# EAGLE board Board (EAGLE 9.6.2)

Size 95.25 x 186.69 mm. Coordinates in mm from the lower left corner, seen from the top.
Outline: 0,0 0,6.35
Outline: 0,6.35 0,184.15 3.81,186.69 92.71,186.69 95.25,185.42 95.25,6.35 92.71,3.81 2.54,3.81 0,6.35
Copper layers (1*16): Top 0.035mm / dielectric 1.5mm / Bottom 0.035mm
Design rules "default": minimum track width 6mil, minimum drill 0.35mm, track to track 6mil, track to pad 6mil, pad to pad 6mil, via to via 6mil, smd to smd 6mil, copper to edge 40mil, drill to drill 6mil, minimum pad ring 10mil, minimum via ring 8mil, stop-mask expansion 4mil, vias tented up to drill 0mil, thermal gap 10mil

## Footprints (pad centres in the part's own frame; a part is rotated, then mirrored left to right if it is on the bottom)
E3,5-8 = drill 0.813 pad 1.6: + -1.778,0 | drill 0.813 pad 1.6 octagon: - 1.778,0
DO41-10 = drill 1.118 long: A 5.08,0; C -5.08,0
DO41Z10 = drill 1.118: A 5.08,0; C -5.08,0
MA04-1 = drill 1.016 long: 1 -3.81,0; 2 -1.27,0; 3 1.27,0; 4 3.81,0
CUI_TB006-508-03BE = drill 1.3 square: 1 0,0 | drill 1.3: 2 5.08,0; 3 10.16,0
RELAY_SRD-05VDC-SL-C = drill 1.32 square: A1 -6.1,6 | drill 1.32: A2 -6.1,-6; NC 6.1,6; NO 6.1,-6 | drill 1.29: COM -8.1,0
DIL04 = drill 0.813 offset: 1 -1.27,-3.81; 2 1.27,-3.81; 3 1.27,3.81; 4 -1.27,3.81
TO92-EBC = drill 0.813 long: B 0,-1.27; C -2.54,-1.27; E 2.54,-1.27
0207/10 = drill 0.813 octagon: 1 -5.08,0; 2 5.08,0
MA03-2 = drill 1.016: 1 -2.54,-1.27 | drill 1.016 octagon: 2 -2.54,1.27; 3 0,-1.27; 4 0,1.27; 5 2.54,-1.27; 6 2.54,1.27
MODULE_DEVKIT_V1_ESP32-WROOM-32 = drill 1.02 square: 1 -12.7,22.85 | drill 1.02: 2 -12.7,20.31; 3 -12.7,17.77; 4 -12.7,15.23; 5 -12.7,12.69; 6 -12.7,10.15; 7 -12.7,7.61; 8 -12.7,5.07; 9 -12.7,2.53; 10 -12.7,-0.01; 11 -12.7,-2.55; 12 -12.7,-5.09; 13 -12.7,-7.63; 14 -12.7,-10.17; 15 -12.7,-12.71; 16 -12.7,-15.25; 17 -12.7,-17.79; 18 -12.7,-20.33; 19 -12.7,-22.87; 20 12.7,-22.87; 21 12.7,-20.33; 22 12.7,-17.79; 23 12.7,-15.25; 24 12.7,-12.71; 25 12.7,-10.17; 26 12.7,-7.63; 27 12.7,-5.09; 28 12.7,-2.55; 29 12.7,-0.01; 30 12.7,2.53; 31 12.7,5.07; 32 12.7,7.61; 33 12.7,10.15; 34 12.7,12.69; 35 12.7,15.23; 36 12.7,17.77; 37 12.7,20.31; 38 12.7,22.85
332-02 = drill 0.9 pad 1.27: 1 0,-1; 2 0,1
W237-102 = drill 1.194 long: 1 -2.5,-1.27; 2 2.5,-1.27
W237-4 = drill 1.194 long: 1 -7.5,-1.27; 2 -2.5,-1.27; 3 2.5,-1.27; 4 7.5,-1.27

## Placement (x,y rotation side)
C1  100n  [E3,5-8]  29.21,77.47 270 top
C2  100n  [E3,5-8]  29.21,92.71 270 top
C3  100n  [E3,5-8]  29.21,107.95 270 top
C4  100n  [E3,5-8]  29.21,121.92 270 top
CA1  100n  [E3,5-8]  73.66,69.85 270 top
CA2  100n  [E3,5-8]  73.66,49.53 90 top
D1  1N4004  [DO41-10]  63.5,83.82 0 top
D2  1N4004  [DO41-10]  53.09,13.59 270 top
D3  1N4004  [DO41-10]  59.69,13.97 270 top
D4  1N4004  [DO41-10]  63.5,78.74 0 top
D5  1N4004  [DO41-10]  67.31,153.67 270 top
D6  1N4004  [DO41-10]  71.12,105.41 180 top
D7  1N4004  [DO41-10]  63.5,88.9 0 top
D8  1N4004  [DO41-10]  63.5,93.98 0 top
D9  1N4004  [DO41-10]  54.61,153.67 270 top
D10  1N4004  [DO41-10]  71.12,116.84 180 top
D11  1N4004  [DO41-10]  41.91,153.67 270 top
D12  1N4004  [DO41-10]  55.88,106.68 180 top
D13  1N4004  [DO41-10]  27.94,153.67 270 top
D14  1N4004  [DO41-10]  55.88,118.11 180 top
DZA1  1N4728  [DO41Z10]  58.42,64.77 0 top
DZA2  1N4728  [DO41Z10]  58.42,71.12 180 top
DZA3  1N4728  [DO41Z10]  58.42,57.15 0 top
DZA4  1N4728  [DO41Z10]  58.42,50.8 180 top
I2C  [MA04-1]  3.81,92.71 90 top
J1  WAGO-03BE  [CUI_TB006-508-03BE]  8.89,8.89 0 top
J2  WAGO-03BE  [CUI_TB006-508-03BE]  66.04,10.16 0 top
J3  WAGO-03BE  [CUI_TB006-508-03BE]  36.83,8.89 0 top
K1  SRD-05VDC-SL-C  [RELAY_SRD-05VDC-SL-C]  71.12,26.67 270 top
K3  SRD-05VDC-SL-C  [RELAY_SRD-05VDC-SL-C]  41.91,26.67 270 top
OK1  PC817  [DIL04]  67.31,40.64 270 top
OK2  PC817  [DIL04]  38.1,40.64 270 top
OK3  PC817  [DIL04]  16.51,78.74 180 top
OK4  PC817  [DIL04]  72.39,100.33 270 top
OK5  PC817  [DIL04]  16.51,92.71 180 top
OK6  PC817  [DIL04]  16.51,106.68 180 top
OK7  PC817  [DIL04]  16.51,120.65 180 top
OK8  PC817  [DIL04]  72.39,111.76 270 top
OK9  PC817  [DIL04]  57.15,100.33 270 top
OK10  PC817  [DIL04]  57.15,113.03 270 top
Q1  BC338  [TO92-EBC]  45.72,40.64 90 top
Q2  BC338  [TO92-EBC]  74.93,40.64 90 top
R1  470  [0207/10]  30.48,85.09 180 top
R2  220  [0207/10]  59.69,40.64 90 top
R3  2K  [0207/10]  59.69,27.94 270 top
R4  220  [0207/10]  53.34,40.64 90 top
R5  2K  [0207/10]  53.34,27.94 270 top
R6  3K  [0207/10]  35.56,77.47 90 top
R7  220  [0207/10]  72.39,153.67 270 top
R8  220  [0207/10]  62.23,153.67 90 top
R9  470  [0207/10]  30.48,100.33 0 top
R10  3K  [0207/10]  35.56,92.71 90 top
R11  470  [0207/10]  30.48,115.57 180 top
R12  3K  [0207/10]  35.56,107.95 90 top
R13  470  [0207/10]  30.48,130.81 180 top
R14  3K  [0207/10]  35.56,123.19 90 top
R15  220  [0207/10]  58.42,153.67 270 top
R16  220  [0207/10]  50.8,153.67 90 top
R17  220  [0207/10]  46.99,153.67 270 top
R18  220  [0207/10]  36.83,153.67 90 top
R19  220  [0207/10]  31.75,153.67 270 top
R20  220  [0207/10]  21.59,153.67 90 top
R23  3K  [0207/10]  8.89,92.71 270 top
R24  3K  [0207/10]  8.89,78.74 270 top
R25  3K  [0207/10]  8.89,106.68 90 top
R26  3K  [0207/10]  8.89,120.65 90 top
RA11  10K  [0207/10]  48.26,67.31 90 top
RA12  100K  [0207/10]  38.1,62.23 0 top
RA13  1K  [0207/10]  38.1,67.31 0 top
RA21  10K  [0207/10]  48.26,52.07 90 top
RA22  100K  [0207/10]  38.1,46.99 0 top
RA23  1K  [0207/10]  38.1,50.8 0 top
SPI  [MA03-2]  3.81,73.66 90 top
U2  DEVKIT_V1_ESP32-WROOM-32  [MODULE_DEVKIT_V1_ESP32-WROOM-32]  15.24,40.64 0 top
UART  332-02  [332-02]  3.81,82.55 180 top
X7  [W237-102]  73.66,59.69 90 top
XINPUT  [W237-4]  73.66,86.36 90 top
XOUTPUT  [W237-4]  67.31,129.54 180 top

## Library data of the parts
C1-C4 CA1 CA2 = rcl; SPICEPREFIX: C
D1-D14 DZA1-DZA4 = diode
I2C SPI = con-lstb; OC_FARNELL: unknown; OC_NEWARK: unknown
J1-J3 = TB006-508-03BE; AVAILABILITY: In Stock; CHECK_PRICES: https://www.snapeda.com/parts/TB006-508-03BE/Same+Sky/view-part/?ref=eda; DESCRIPTION: 2~24 Poles, Screw Type, Horizontal, 5.08 Pitch, 26~14 (AWG), Terminal Block Connector; MF: Same Sky; MP: TB006-508-03BE; PACKAGE: None; PRICE: None; SNAPEDA_LINK: https://www.snapeda.com/parts/TB006-508-03BE/Same+Sky/view-part/?ref=snap
K1 K3 = SRD-05VDC-SL-C; AVAILABILITY: In Stock; CHECK_PRICES: https://www.snapeda.com/parts/SRD-05VDC-SL-C/Songle+Relay/view-part/?ref=eda; DESCRIPTION: 5V Trigger Relay Module For Arduino And Raspberry Pi 5V Trigger Relay Module For Arduino And Raspberry Pi; MF: Songle Relay; MP: SRD-05VDC-SL-C; PACKAGE: NON STANDARD-5 Songle Relay; PRICE: None; SNAPEDA_LINK: https://www.snapeda.com/parts/SRD-05VDC-SL-C/Songle+Relay/view-part/?ref=snap
OK1-OK10 = optocoupler; MPN: PC817X4J000F; OC_FARNELL: 9707727; OC_NEWARK: 97K7059
Q1 Q2 = transistor-npn
R1-R20 R23-R26 RA11-RA13 RA21-RA23 = rcl; SPICEPREFIX: R
U2 = DEVKIT_V1_ESP32-WROOM-32; AVAILABILITY: Not in stock; CHECK_PRICES: https://www.snapeda.com/parts/DEVKIT%20V1%20ESP32-WROOM-32/Espressif+Systems/view-part/?ref=eda; DESCRIPTION: WROOM-32 Development Board ESP32 ESP-32S WiFi Bluetooth Dev Module; MF: Espressif Systems; MP: DEVKIT V1 ESP32-WROOM-32; PACKAGE: Package; PRICE: None; SNAPEDA_LINK: https://www.snapeda.com/parts/DEVKIT%20V1%20ESP32-WROOM-32/Espressif+Systems/view-part/?ref=snap
UART = con-garry
X7 = con-wago-500; MPN: 237-102; OC_FARNELL: unknown; OC_NEWARK: 70K9898
XINPUT XOUTPUT = con-wago-500; OC_FARNELL: unknown; OC_NEWARK: unknown

## Nets
3V3: OK3.4 OK5.4 OK6.4 OK7.4 U2.1
5V: D2.C D3.C DZA1.C DZA3.C I2C.2 J1.2 K1.A1 K3.A1 OK1.4 OK2.4 SPI.5 U2.19
12V: J1.1 R8.1 R16.1 R18.1 R20.1
A1: RA11.1 RA12.2 RA13.2 RA21.1 RA22.2 RA23.2 U2.7 X7.1
A2: U2.8 X7.2
AI1: CA1.+ CA2.+ DZA1.A DZA2.C DZA3.A DZA4.C RA11.2 RA21.2
COM1: J2.2 K1.COM
COM2: J3.2 K3.COM
CS: SPI.2 U2.29
EN: U2.2
GND: C1.- C2.- C3.- C4.- CA1.- CA2.- DZA2.A DZA4.A I2C.1 J1.3 OK3.2 OK5.2 OK6.2 OK7.2 Q1.E Q2.E R1.2 R2.2 R3.2 R4.2 R5.2 R7.2 R9.2 R11.2 R13.2 R15.2 R17.2 R19.2 RA12.1 RA13.1 RA22.1 RA23.1 SPI.1 U2.14 U2.32 U2.38
IN1+: D4.A XINPUT.1
IN2+: D1.A XINPUT.2
IN3+: D7.A XINPUT.3
IN4+: D8.A XINPUT.4
IO4: U2.26
IO16: U2.27
IO17: U2.28
MISO: SPI.6 U2.31
MOSI: SPI.3 U2.37
N$1: OK2.2 R4.1
N$2: OK1.2 R2.1
N$3: OK1.3 Q1.B R3.1
N$4: D2.A K1.A2 Q1.C
N$5: OK5.3 R23.2
N$6: OK2.3 Q2.B R5.1
N$7: D3.A K3.A2 Q2.C
N$8: OK3.3 R24.2
N$9: C1.+ OK3.1 R1.1 R6.2
N$10: D5.C OK4.1
N$11: D4.C R6.1
N$12: OK4.2 R7.1
N$13: D6.A R8.2
N$14: C2.+ OK5.1 R9.1 R10.2
N$15: D1.C R10.1
N$16: C3.+ OK6.1 R11.1 R12.2
N$17: D7.C R12.1
N$18: C4.+ OK7.1 R13.1 R14.2
N$19: D8.C R14.1
N$20: D9.C OK8.1
N$21: OK8.2 R15.1
N$22: D10.A R16.2
N$23: D11.C OK9.1
N$24: OK9.2 R17.1
N$25: D12.A R18.2
N$26: D13.C OK10.1
N$27: OK10.2 R19.1
N$28: D14.A R20.2
N$29: D12.C OK9.4
N$44: U2.16
N$45: U2.17
N$46: U2.18
N$49: OK6.3 R25.2
N$50: OK7.3 R26.2
N$52: D14.C OK10.4
N$53: D10.C OK8.4
N$55: D6.C OK4.4
N$61: U2.25
N$64: U2.22
N$65: U2.21
N$66: U2.20
NC1: J2.3 K1.NC
NC2: J3.3 K3.NC
NO1: J2.1 K1.NO
NO2: J3.1 K3.NO
OUT1+: OK4.3 XOUTPUT.1
OUT2+: OK8.3 XOUTPUT.2
OUT3+: OK9.3 XOUTPUT.3
OUT4+: OK10.3 XOUTPUT.4
R1: D5.A U2.11
R2: D9.A U2.12
R3: D11.A U2.13
R4: D13.A U2.15
RR1: OK1.1 U2.23
RR2: OK2.1 U2.24
RX0: U2.34 UART.2
S1: R24.1 U2.5
S2: R23.1 U2.6
S3: R25.1 U2.9
S4: R26.1 U2.10
SCK: SPI.4 U2.30
SCL: I2C.4 U2.36
SDA: I2C.3 U2.33
TX0: U2.35 UART.1
VN: U2.4
VP: U2.3

## Tracks (layer width: path | path; a pad name or v marks a point on that pad's centre or on a via)
3V3  (4 unrouted)
5V  (11 unrouted)
12V  (4 unrouted)
A1  (7 unrouted)
A2  (1 unrouted)
AI1  (7 unrouted)
COM1  (1 unrouted)
COM2  (1 unrouted)
CS  (1 unrouted)
GND  (35 unrouted)
IN1+  (1 unrouted)
IN2+  (1 unrouted)
IN3+  (1 unrouted)
IN4+  (1 unrouted)
MISO  (1 unrouted)
MOSI  (1 unrouted)
N$1  (1 unrouted)
N$2  (1 unrouted)
N$3  (2 unrouted)
N$4  (2 unrouted)
N$5  (1 unrouted)
N$6  (2 unrouted)
N$7  (2 unrouted)
N$8  (1 unrouted)
N$9  (3 unrouted)
N$10  (1 unrouted)
N$11  (1 unrouted)
N$12  (1 unrouted)
N$13  (1 unrouted)
N$14  (3 unrouted)
N$15  (1 unrouted)
N$16  (3 unrouted)
N$17  (1 unrouted)
N$18  (3 unrouted)
N$19  (1 unrouted)
N$20  (1 unrouted)
N$21  (1 unrouted)
N$22  (1 unrouted)
N$23  (1 unrouted)
N$24  (1 unrouted)
N$25  (1 unrouted)
N$26  (1 unrouted)
N$27  (1 unrouted)
N$28  (1 unrouted)
N$29  (1 unrouted)
N$49  (1 unrouted)
N$50  (1 unrouted)
N$52  (1 unrouted)
N$53  (1 unrouted)
N$55  (1 unrouted)
NC1  (1 unrouted)
NC2  (1 unrouted)
NO1  (1 unrouted)
NO2  (1 unrouted)
OUT1+  (1 unrouted)
OUT2+  (1 unrouted)
OUT3+  (1 unrouted)
OUT4+  (1 unrouted)
R1  (1 unrouted)
R2  (1 unrouted)
R3  (1 unrouted)
R4  (1 unrouted)
RR1  (1 unrouted)
RR2  (1 unrouted)
RX0  (1 unrouted)
S1  (1 unrouted)
S2  (1 unrouted)
S3  (1 unrouted)
S4  (1 unrouted)
SCK  (1 unrouted)
SCL  (1 unrouted)
SDA  (1 unrouted)
TX0  (1 unrouted)